# EAGLE board HEX3_leg_board_v2.0 (EAGLE 9.7.0)
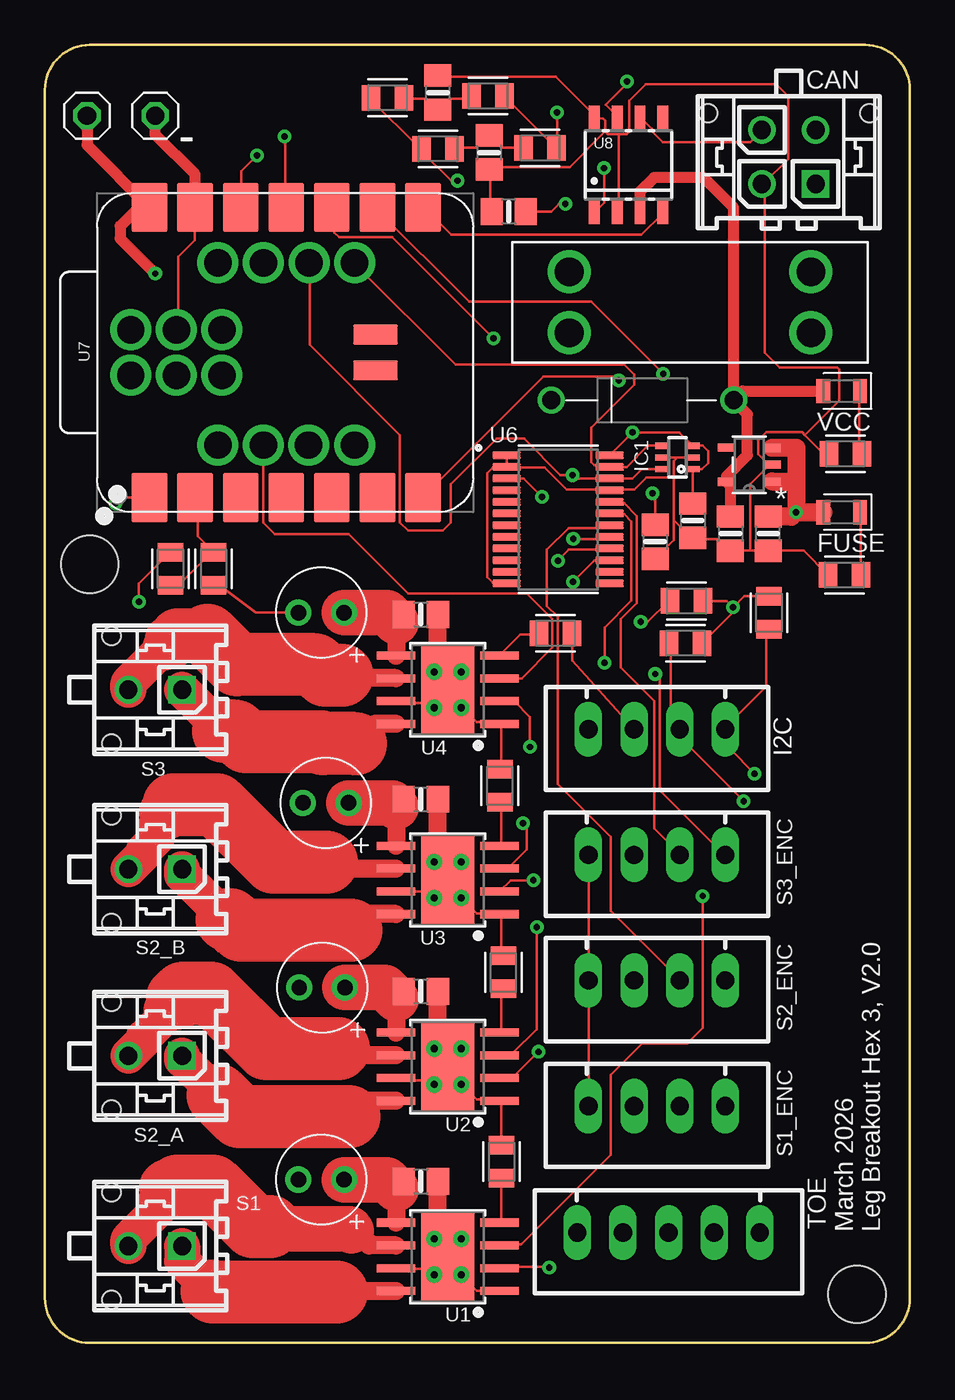
[diagram p0: board, top side]
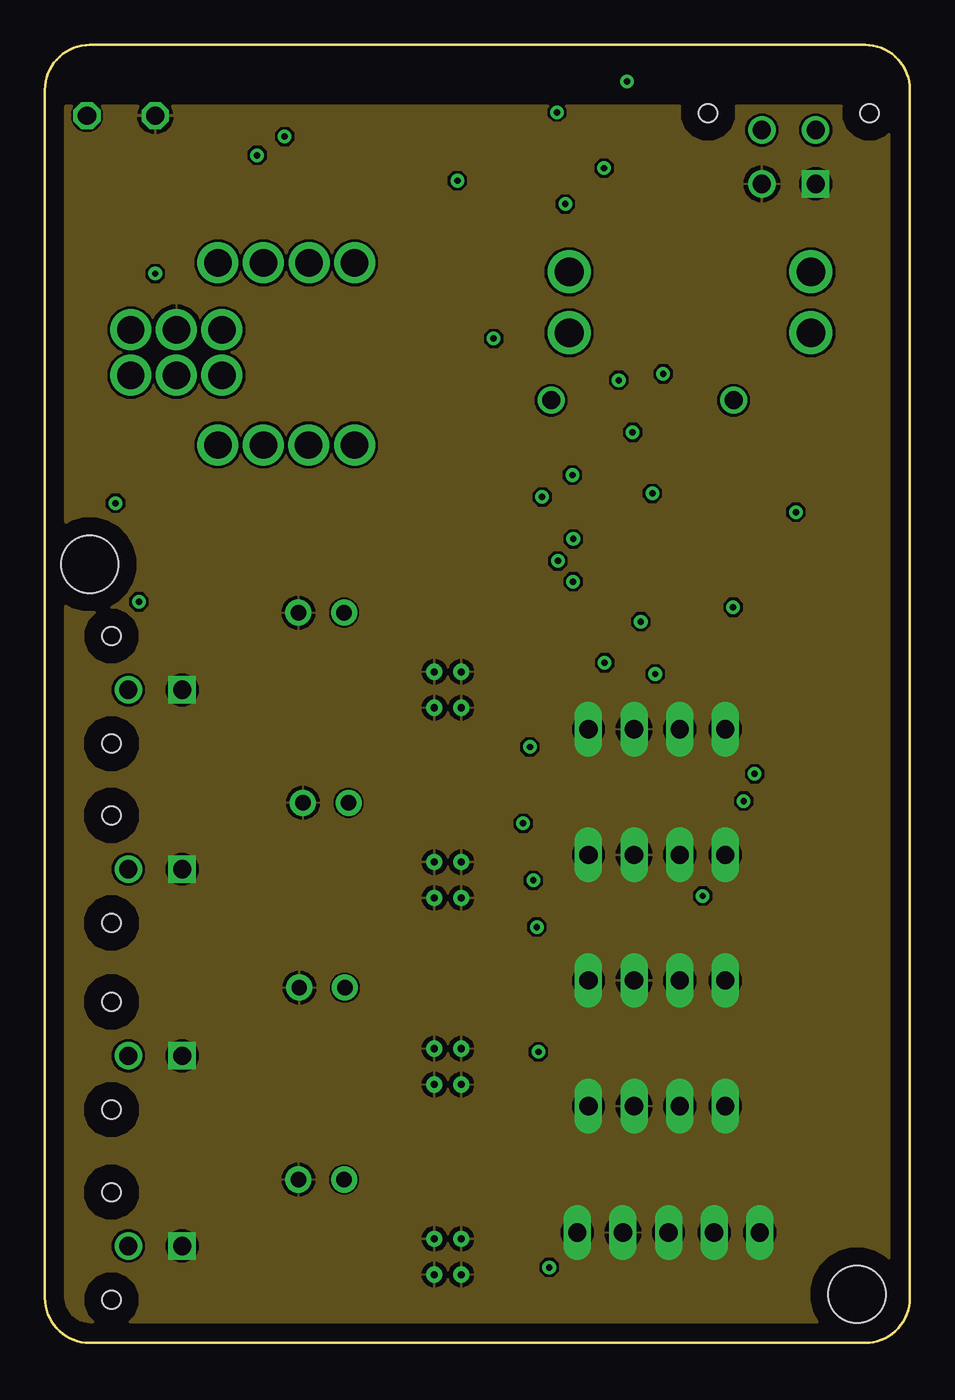
[diagram p1: board, inner layer Route2]
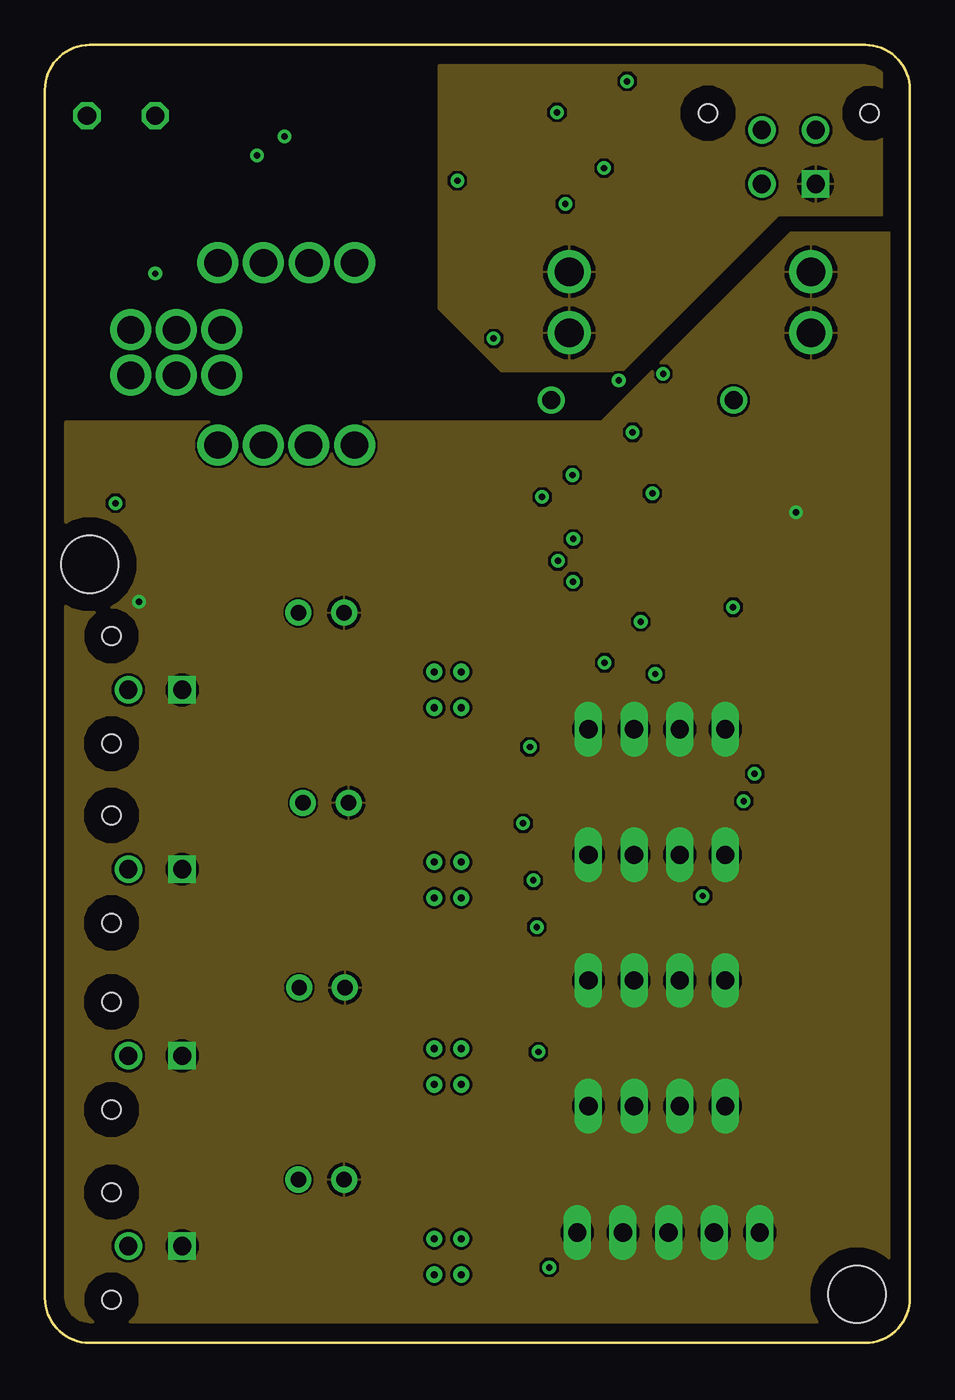
[diagram p2: board, inner layer Route15]
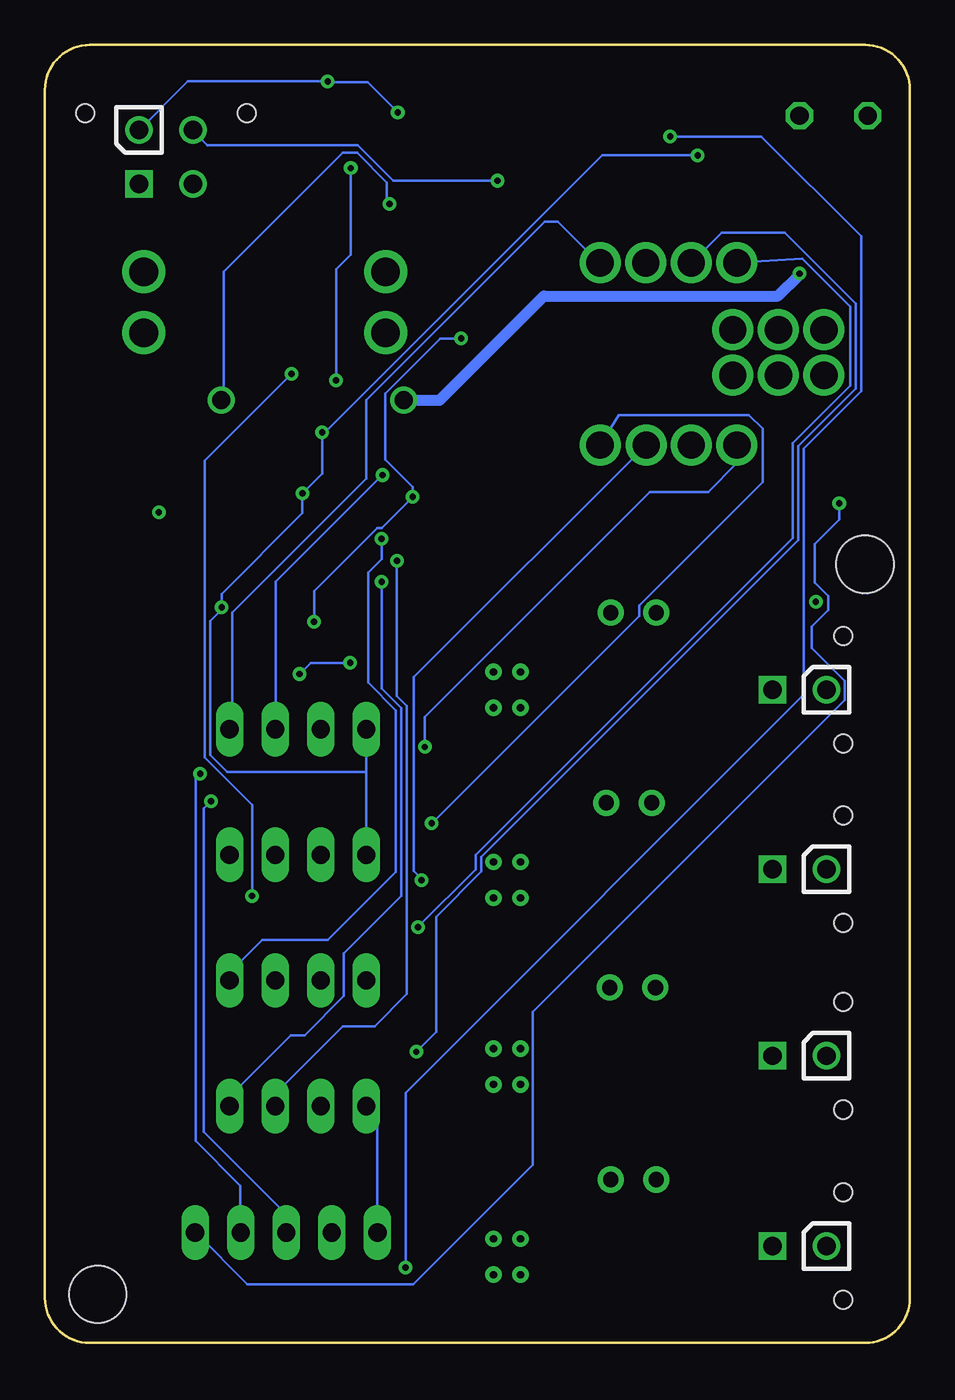
[diagram p3: board, bottom side, seen from below]

Size 48.2 x 72.35 mm. Coordinates in mm from the lower left corner, seen from the top.
Outline: 0,69.85 0,2.5 arc90 2.5,0 45.7,0 arc90 48.2,2.5 48.2,69.85 arc90 45.7,72.35 2.5,72.35 arc90 0,69.85
Copper layers (1+2*15+16): Top / Route2 / Route15 / Bottom
Stack-up 4 Layer Stack: Top SilkScreen Epoxy Ink / Top SolderMask SR:Green 0.0254mm Dk 4.3 / Top Surface Finish Lead-Free 0.02mm / Top CuFoil:007 0.035mm / Dielectric-1 Prepreg:001 0.064mm / Dielectric-2 Prepreg:001 0.064mm / Route2 CuFoil:007 0.035mm / Dielectric-3 Core:066 0.711mm / Route15 CuFoil:007 0.035mm / Dielectric-4 Prepreg:001 0.064mm / Dielectric-5 Prepreg:001 0.064mm / Bottom CuFoil:007 0.035mm / Bottom Surface Finish Lead-Free 0.02mm / Bottom SolderMask SR:Green 0.0254mm Dk 4.3 / Bottom SilkScreen Epoxy Ink
Design rules: minimum copper width 6mil, minimum drill size 0.35mm, copper clearance wire_polygon to wire_polygon 6mil, copper clearance wire_polygon to pad_smd 6mil, copper clearance wire_polygon to via 6mil, copper clearance pad_smd to pad_smd 6mil, copper clearance pad_smd to via 0.5mm, copper clearance via to via 6mil, copper clearance smd to pad (same net) 6mil, copper clearance smd to via (same net) 6mil, copper clearance smd to smd (same net) 6mil, dimension clearance 40mil, via restrict clearance 0mil, restrict clearance 0mil, drill distance 6mil, keepout clearance 0mil
Holes 3.2 mm at 45.25,2.7 2.5,43.4

## Footprints (pad centres in the part's own frame; a part is rotated, then mirrored left to right if it is on the bottom)
0805-NO = smd 1.24 x 1.5: 1 -0.95,0; 2 0.95,0
CAPPRD254W65D500H1150B = drill 0.85 pad 1.45: 1 -1.27,0; 2 1.27,0
1X01 = drill 1.016 octagon: 1 0,0
DIODE-AXIAL = drill 1: 1 -5.08,0; 2 5.08,0
JST-XH-04-PACKAGE-LONG-PAD = drill 1.016 long: 1 -3.81,0; 2 -1.27,0; 3 1.27,0; 4 3.81,0
FUSE_3557-2 = drill 1.6: 1_1 -6.735,1.7; 1_2 -6.735,-1.7; 2_1 6.735,1.7; 2_2 6.735,-1.7
LEDC2012X110N_FLAT-R = smd 0.762 x 1.362: A 1.025,0; C -1.025,0
SC70-6L = smd 0.35 x 0.8: 1 -0.65,-0.85; 2 0,-0.85; 3 0.65,-0.85; 4 0.65,0.85; 5 0,0.85; 6 -0.65,0.85
43045-0412 = drill 1.02 square: P$1 1.5,0 | drill 1.02: P$2 -1.5,0; P$3 1.5,3; P$4 -1.5,3 | hole 1.02: 4.5,3.94; -4.5,3.94
RESC2012X65 = smd 1.031 x 1.42: 1 -0.919,0; 2 0.919,0
43045-0212 = drill 1.02 square: P$1 0,0 | drill 1.02: P$2 0,3 | hole 1.02: 3,3.94; -3,3.94
JST-XH-05-PACKAGE-LONG-PAD = drill 1.016 long: 1 -5.08,0; 2 -2.54,0; 3 0,0; 4 2.54,0; 5 5.08,0
HSOP8 = smd 0.45 x 2.15: 1 -1.905,-2.875; 2 -0.635,-2.875; 3 0.635,-2.875; 4 1.905,-2.875; 5 1.905,2.875; 6 0.635,2.875; 7 -0.635,2.875; 8 -1.905,2.875 | smd 4.9 x 2.95: GND 0,0 | drill 0.4: P$1 -1,0.75; P$2 -1,-0.75; P$3 1,-0.75; P$4 1,0.75
TSOT23-5_ONS = smd 0.953 x 0.457: 1 -1.276,0.94; 2 -1.276,0; 3 -1.276,-0.94; 4 1.276,-0.953; 5 1.276,0.953
SOP65P640X120-24N = smd 1.57 x 0.41: 1 -2.87,3.575; 2 -2.87,2.925; 3 -2.87,2.275; 4 -2.87,1.625; 5 -2.87,0.975; 6 -2.87,0.325; 7 -2.87,-0.325; 8 -2.87,-0.975; 9 -2.87,-1.625; 10 -2.87,-2.275; 11 -2.87,-2.925; 12 -2.87,-3.575; 13 2.87,-3.575; 14 2.87,-2.925; 15 2.87,-2.275; 16 2.87,-1.625; 17 2.87,-0.975; 18 2.87,-0.325; 19 2.87,0.325; 20 2.87,0.975; 21 2.87,1.625; 22 2.87,2.275; 23 2.87,2.925; 24 2.87,3.575
XIAO-RP2350-SMD = smd 2 x 2.75: 1 7.62,8.082; 2 5.08,8.082; 3 2.54,8.082; 4 0,8.082; 5 -2.54,8.082; 6 -5.08,8.082; 7 -7.62,8.082; 8 -7.62,-8.082; 9 -5.08,-8.082; 10 -2.54,-8.082; 11 0,-8.082; 12 2.54,-8.082; 13 5.08,-8.082; 14 7.62,-8.082 | smd 2.5 x 1.1: 29 -4.975,1; 30 -4.975,-1 | drill 1.524: P$1 3.581,1.27; P$2 6.121,1.27; P$3 8.661,1.27; P$4 8.661,-1.27; P$5 6.121,-1.27; P$6 3.581,-1.27; P$7 3.81,-5.004; P$8 1.27,-5.004; P$9 -1.27,-5.004; P$10 -3.81,-5.004; P$11 -3.81,5.156; P$12 -1.245,5.156; P$13 1.27,5.156; P$14 3.81,5.156
SOT96-1 = smd 0.6 x 1.3: 1 -1.905,-2.65; 2 -0.635,-2.65; 3 0.635,-2.65; 4 1.905,-2.65; 5 1.905,2.65; 6 0.635,2.65; 7 -0.635,2.65; 8 -1.905,2.65
LEDC2012X110N_FLAT-B = smd 0.762 x 1.362: A 1.025,0; C -1.025,0

## Placement (x,y rotation side)
C1  0.1uF/50V  [0805-NO]  20.95,19.6 0 top
C2  22uF/50V  [CAPPRD254W65D500H1150B]  15.45,19.8 180 top
C3  0.1uF/50V  [0805-NO]  20.95,30.3 0 top
C4  22uF/50V  [CAPPRD254W65D500H1150B]  15.65,30.1 180 top
C5  0.1uF/50V  [0805-NO]  20.95,40.6 0 top
C6  22uF/50V  [CAPPRD254W65D500H1150B]  15.4,40.7 180 top
C7  0.1uF/50V  [0805-NO]  20.95,9 0 top
C8  47nF  [0805-NO]  24.75,66.35 270 top
C9  1uF  [0805-NO]  38.2,45.1 270 top
C10  1uF  [0805-NO]  40.3,45.1 90 top
C11  47nF  [0805-NO]  21.9,69.69 90 top
C12  10uF  [0805-NO]  34,44.65 270 top
C13  0.1uF  [0805-NO]  25.85,63.05 180 top
C14  0.01uF  [0805-NO]  36.1,45.83 270 top
C15  22uF/50V  [CAPPRD254W65D500H1150B]  15.4,9.1 180 top
CAP_5V_DIODE  PINHD-1X1  [1X01]  2.35,68.4 0 top
CAP_GND  PINHD-1X1  [1X01]  6.15,68.4 0 top
D1  DIODEDIODE-AXIAL  [DIODE-AXIAL]  33.29,52.54 180 top
EXTRA  JST-XH-04-PIN-LONG-PAD  [JST-XH-04-PACKAGE-LONG-PAD]  34.1,34.2 180 top
F1  3557-2  [FUSE_3557-2]  35.95,58 0 top
FUSE  LED_RED  [LEDC2012X110N_FLAT-R]  44.4,46.3 180 top
IC1  LTC4311_SC70  [SC70-6L]  35.25,49.35 90 top
IN  [43045-0412]  41.45,64.6 0 top
R1  1.5K  [RESC2012X65]  44.55,42.8 180 top
R2  470  [RESC2012X65]  44.6,49.55 180 top
R3  62K  [RESC2012X65]  7,43.15 90 top
R4  10K  [RESC2012X65]  9.4,43.15 90 top
R5  10K  [RESC2012X65]  35.75,41.35 180 top
R6  10K  [RESC2012X65]  40.35,40.7 270 top
R7  22K  [RESC2012X65]  25.45,10.1 270 top
R8  22K  [RESC2012X65]  25.35,31.05 270 top
R9  22K  [RESC2012X65]  28.45,39.55 180 top
R10  22K  [RESC2012X65]  25.55,20.65 270 top
R11  10K  [RESC2012X65]  35.7,39 180 top
R12  60  [RESC2012X65]  21.9,66.55 180 top
R14  60  [RESC2012X65]  24.69,69.5 180 top
R15  60  [RESC2012X65]  19.1,69.4 180 top
R16  60  [RESC2012X65]  27.6,66.6 180 top
S1  [43045-0212]  7.65,5.4 90 top
S1_ENC  JST-XH-04-PIN-LONG-PAD  [JST-XH-04-PACKAGE-LONG-PAD]  34.1,13.2 180 top
S2_A  [43045-0212]  7.65,16 90 top
S2_B  [43045-0212]  7.65,26.4 90 top
S2_ENC  JST-XH-04-PIN-LONG-PAD  [JST-XH-04-PACKAGE-LONG-PAD]  34.1,20.2 180 top
S3  [43045-0212]  7.65,36.4 90 top
S3_ENC  JST-XH-04-PIN-LONG-PAD  [JST-XH-04-PACKAGE-LONG-PAD]  34.1,27.2 180 top
TOE  JST-XH-05-PIN-LONG-PAD  [JST-XH-05-PACKAGE-LONG-PAD]  34.75,6.15 180 top
U1  DRV8871  [HSOP8]  22.45,4.8 90 top
U2  DRV8871  [HSOP8]  22.45,15.4 90 top
U3  DRV8871  [HSOP8]  22.45,25.8 90 top
U4  DRV8871  [HSOP8]  22.45,36.4 90 top
U5  NCP718ASN500T1GTSOT23-5_ONS  [TSOT23-5_ONS]  39.25,48.95 180 top
U6  TCA9548APWR  [SOP65P640X120-24N]  28.6,45.9 0 top
U7  XIAO-RP2350-SMD  [XIAO-RP2350-SMD]  13.45,55.2 180 top
U8  TJA1050  [SOT96-1]  32.52,65.66 0 top
VCC  LED_BLUE  [LEDC2012X110N_FLAT-B]  44.39,53.05 180 top

## Library data of the parts
C1 C3 C5 C7-C14 IC1 U1-U4 = microbuilder
C2 C4 C6 C15 D1 = Tinkercad
CAP_5V_DIODE CAP_GND = Connector; CATEGORY: Headers; DESCRIPTION: Header-Straight-1 Position; PACKAGE_TYPE: THT; PITCH: 0.100" (2.54mm); SUBCATEGORY: Headers-Male Pins; TYPE: Board to Board or Cable-Unshrouded-Through Hole-Straight
EXTRA S1_ENC S2_ENC S3_ENC TOE = Rembrandt Electronics - JST XH Connectors v1-0
F1 = Mini Blade Fuse 3557-2; AVAILABILITY: In Stock; CHECK_PRICES: https://www.snapeda.com/parts/3557-2/Keystone/view-part/?ref=eda; DESCRIPTION: THM 2 in 1 Auto Blade Holder; MF: Keystone Electronics; MP: 3557-2; PACKAGE: Nonstandard Keystone; PRICE: None; SNAPEDA_LINK: https://www.snapeda.com/parts/3557-2/Keystone/view-part/?ref=snap
FUSE = LED; CATEGORY: LED; COLOR: RED; DESCRIPTION: CHIP LED FLAT; SUB-CATEGORY: CHIP; TYPE: FLAT_TOP
IN S1 S2_A S2_B S3 = Molex Connectors
R1-R12 R14-R16 = Resistor; CATEGORY: Resistors; DESCRIPTION: Chip Resistor 2.00 X 1.25 X 0.65 mm body 0805(2012-METRIC) Package; PACKAGE_SIZE: 0805; PACKAGE_TYPE: SMD
U5 = NCP718ASN500T1G Voltage Regulator; COPYRIGHT: Copyright (C) 2025 Ultra Librarian. All rights reserved.; MANUFACTURER_NAME: onsemi; MANUFACTURER_PART_NUMBER: NCP718ASN500T1G
U6 = TCA9548APWR I2C MUX; AVAILABILITY: In Stock; CHECK_PRICES: https://www.snapeda.com/parts/TCA9548APWR/Texas+Instruments/view-part/?ref=eda; DESCRIPTION: 8-channel 1.65- to 5.5-V I2C/SMBus switch with reset & voltage translation; MF: Texas Instruments; MP: TCA9548APWR; PACKAGE: TSSOP-24 Texas Instruments; PRICE: None; SNAPEDA_LINK: https://www.snapeda.com/parts/TCA9548APWR/Texas+Instruments/view-part/?ref=snap
U7 = XIAO-RP2350-SMD
U8 = TJA1050; AVAILABILITY: In Stock; CHECK_PRICES: https://www.snapeda.com/parts/TJA1050/NXP+Semiconductors/view-part/?ref=eda; DESCRIPTION: CAN 1MBd Silent 5V Automotive 8-Pin SO T/R; MF: NXP Semiconductors; MP: TJA1050; PACKAGE: None; PRICE: None; SNAPEDA_LINK: https://www.snapeda.com/parts/TJA1050/NXP+Semiconductors/view-part/?ref=snap
VCC = LED; CATEGORY: LED; COLOR: BLUE; DESCRIPTION: CHIP LED FLAT; SUB-CATEGORY: CHIP; TYPE: FLAT_TOP

## Nets
3.3V: C12.1 C14.1 EXTRA.4 IC1.1 IC1.3 R5.1 R6.1 R11.1 S1_ENC.4 S2_ENC.4 S3_ENC.4 TOE.5 U6.24 U7.12
5V: C9.1 C13.1 D1.1 U5.5 U8.3 VCC.A
5V_DIODE: CAP_5V_DIODE.1 D1.2 U7.14
24V: F1.1_1 F1.1_2 IN.P$1
24V_FUSE: C1.1 C2.1 C3.1 C4.1 C5.1 C6.1 C7.1 C10.2 C15.1 F1.2_1 F1.2_2 FUSE.A R3.2 U1.5 U2.5 U3.5 U4.5 U5.1 U5.3
CAN_RX: U7.8 U8.4
CAN_TX: U7.7 U8.1
CANH: IN.P$3 R14.1 R16.1 U8.7
CANL: IN.P$4 R12.2 R15.2 U8.6
GND: C1.2 C2.2 C3.2 C4.2 C5.2 C6.2 C7.2 C8.2 C9.2 C10.1 C11.2 C12.2 C13.2 C14.2 C15.2 CAP_GND.1 EXTRA.3 IC1.2 IC1.5 IN.P$2 R1.2 R2.2 R4.1 R7.1 R8.1 R9.1 R10.1 S1_ENC.3 S2_ENC.3 S3_ENC.3 TOE.4 U1.1 U1.7 U1.GND U1.P$1 U1.P$2 U1.P$3 U1.P$4 U2.1 U2.7 U2.GND U2.P$1 U2.P$2 U2.P$3 U2.P$4 U3.1 U3.7 U3.GND U3.P$1 U3.P$2 U3.P$3 U3.P$4 U4.1 U4.7 U4.GND U4.P$1 U4.P$2 U4.P$3 U4.P$4 U5.2 U6.1 U6.2 U6.12 U6.21 U7.13 U7.P$5 U8.2 U8.8
MUX_RESET: R5.2 U6.3 U7.10
MUX_SCL: EXTRA.2 IC1.6 R11.2 TOE.3 U6.22 U7.P$9
MUX_SDA: EXTRA.1 IC1.4 R6.2 TOE.2 U6.23 U7.P$10
N$1: R7.2 U1.4
N$2: R10.2 U2.4
N$3: R8.2 U3.4
N$4: R9.2 U4.4
N$6: FUSE.C R1.1
N$8: R2.1 VCC.C
N$9: R3.1 R4.2 U7.2
N$10: C11.1 R14.2 R15.1
N$11: C8.1 R12.1 R16.2
OUT1: S1.P$2 U1.6
OUT2: S1.P$1 U1.8
OUT3: S2_A.P$1 U2.8
OUT4: S2_A.P$2 U2.6
OUT5: S2_B.P$1 U3.8
OUT6: S2_B.P$2 U3.6
OUT7: S3.P$1 U4.8
OUT8: S3.P$2 U4.6
S1_A: U1.3 U7.9
S1_B: U1.2 U7.11
S1_SCL: S1_ENC.2 U6.16
S1_SDA: S1_ENC.1 U6.15
S2_SCL: S2_ENC.2 U6.18
S2_SDA: S2_ENC.1 U6.17
S2A_A: U2.3 U7.P$7
S2A_B: U2.2 U7.P$8
S2B_A: U3.3 U7.P$11
S2B_B: U3.2 U7.P$12
S3_A: U4.3 U7.P$13
S3_B: U4.2 U7.P$14
S3_SCL: S3_ENC.2 U6.20
S3_SDA: S3_ENC.1 U6.19
TOE_GPIO: TOE.1 U7.1

## Tracks (layer width: path | path; a pad name or v marks a point on that pad's centre or on a via)
3.3V  (via drill 0.35)
  Top 0.152: C14.1 IC1.1 36.6,48.7 36.95,49.05 36.95,49.7 36.65,50 IC1.3 35.35,50.75 v32.75,50.75 32.55,50.55 U6.24 | v33.85,47.35 34,47.2 C12.1 | v38.35,41 38,41.35 R5.1 | v38.35,41 38.97,41.62 R6.1 | v38.35,41 38.35,40.73 R11.1 | S1_ENC.4 30.3,13.27 30.3,20.13 S2_ENC.4 30.3,20.28 30.3,27.14 S3_ENC.4 | v11.83,66.19 10.95,65.31 10.95,63.41 U7.12
  Bottom 0.152: 30.3,31.82 30.3,34.15 EXTRA.4 | 30.3,31.82 30.3,27.29 S3_ENC.4 | 30.3,31.82 38.03,31.82 38.99,32.78 38.99,40.24 38.38,40.85 v38.35,41 38.35,41.75 33.85,46.25 v33.85,47.35 32.75,48.45 v32.75,50.75 32.74,50.61 17.15,66.19 v11.83,66.19 | TOE.5 29.69,6.26 29.69,12.66 30.15,13.12 S1_ENC.4
5V  (via drill 0.35)
  Top 0.152: C13.1 28.21,63.05 28.64,63.48 v29,63.48
  Top 0.61: D1.1 38.88,53.05 VCC.A | D1.1 39.15,51.76 39.15,49.47 37.97,48.3 U5.5 38.2,47.77 C9.1 | D1.1 38.37,63.28 36.7,64.95 33.95,64.95 33.16,64.16 U8.3
  Bottom 0.152: D1.1 38.23,52.59 38.23,59.72 31.61,66.33 30.8,66.33 29.15,64.68 29.15,63.63 v29,63.48
5V_DIODE  (via drill 0.35)
  Top 0.61: v6.15,59.6 4.2,61.55 4.2,62.25 5.23,63.28 U7.14 2.35,66.76 CAP_5V_DIODE.1
  Bottom 0.61: D1.2 26.21,52.54 20.4,58.35 7.35,58.35 6.15,59.55 v6.15,59.6
24V
  pour Route15: 21.9,72 21.9,57.6 25.4,54.1 32.2,54.1 40.9,62.8 46.7,62.8 46.7,72
24V_FUSE  (via drill 0.35)
  Top 0.152: R3.2 5.24,42.31 v5.24,41.31
  Top 1.016: v41.85,46.3 41.88,46.33 41.88,47.83 | v41.85,46.3 41.6,46.05 C10.2 | U4.5 19.57,40.18 C5.1 | U3.5 19.57,29.87 C3.1 | U2.5 19.57,19.18 C1.1 | U1.5 19.57,8.57 C7.1 | U5.1 41.69,48.01 41.88,47.83 | U5.3 41.88,49.89 41.88,47.83 | v41.85,46.3 FUSE.A
  Top 2.54: C6.1 19.05,40.7 19.57,40.18 | C15.1 19.05,9.1 19.57,8.57 | C2.1 18.95,19.8 19.57,19.18 | C4.1 19.35,30.1 19.57,29.87
  pour Route15: -3.65,-2.85 51.3,-2.85 51.75,-2.4 51.75,58.95 48.75,61.95 41.55,61.95 31,51.4 -3.3,51.4 -3.9,50.8 -3.9,-2.6
CAN_RX
  Top 0.152: U8.4 34.42,62.95 33.24,61.77 22.64,61.77 21.16,63.26 U7.8
CAN_TX  (via drill 0.35)
  Top 0.152: v31.16,65.48 31.16,63.55 U8.1 | v31.98,53.66 31.78,53.86 27.76,53.86 21.16,47.25 U7.7
  Bottom 0.152: v31.16,65.48 31.16,60.66 31.98,59.84 v31.98,53.66
CANH  (via drill 0.35)
  Top 0.152: v32.44,70.32 32.44,70.22 31.24,69.02 31.83,68.44 U8.7 | v28.54,68.58 28.54,66.6 R16.1 28.47,66.61 25.73,69.35 R14.1
  Bottom 0.152: IN.P$3 40.24,70.32 v32.44,70.32 32.44,70.27 30.22,70.27 v28.54,68.58
CANL  (via drill 0.35)
  Top 0.152: R15.2 18.11,69.35 20.85,66.61 R12.2 20.98,66.44 22.64,64.78 v22.99,64.78 | U8.6 33.2,68.28 33.81,67.68 33.81,67.52 34.42,66.91 39.29,66.91 39.9,67.52 IN.P$4
  Bottom 0.152: v22.99,64.78 28.78,64.78 30.76,66.76 39.14,66.76 39.9,67.52 IN.P$4
GND
  Top 0.152: 21.61,3.82 21.31,4.12 19.63,4.12 U1.7 | 23.29,3.67 U1.GND 21.61,3.82 | 21.61,24.85 21.31,25.16 19.63,25.16 U3.7 | U2.7 19.63,14.64 21.46,14.64 21.61,14.49 U2.GND | U2.GND 23.29,14.34 24.05,13.57 25.27,13.57 U2.1 25.43,13.42 25.43,11.14 R7.1 | 21.61,35.52 21.46,35.67 19.63,35.67 U4.7 | R4.1 9.75,42.22 11.74,40.7 C6.2 | U7.13 8.36,63.26 8.36,61.47 7.44,60.56 7.44,56.55 U7.P$5 | 21.61,35.52 U4.GND 23.29,35.37 24.05,34.61 25.27,34.61 U4.1 25.43,34.45 25.43,32.01 R8.1 | 21.61,35.52 U4.P$1 | U2.GND 23.29,16.47 U2.P$3 | 21.61,24.85 U3.GND 23.29,24.7 24.05,23.94 25.27,23.94 U3.1 25.43,23.78 25.43,21.65 R10.1 | 21.61,24.85 U3.P$1 | 21.61,3.82 U1.P$1 | 31.22,67.52 31.37,67.37 31.98,67.37 | 31.22,67.52 31.22,67.53 31.22,68.13 31.12,68.23 U8.8 30.61,68.44 28.47,70.57 21.92,70.57 C11.2 | 39.29,44.15 C9.2 38.07,44.21 37.46,44.82 36.25,44.82 C14.2 36.02,44.88 35.05,45.85 | 39.29,44.15 C10.1 42.28,44.15 R1.2 | IC1.5 35.25,49.35 | 35.25,49.35 IC1.2 | 35.25,49.35 35.05,49.15 35.05,48.22 | 35.05,48.22 35.05,45.85 | 35.05,45.85 35.05,44.75 C12.2 | U6.12 25.73,42.38 24.97,42.38 24.66,42.68 24.66,48.47 24.97,48.78 25.73,48.78 U6.2 | U6.1 25.73,49.39 25.73,48.93 U6.2 | 35.05,48.22 33.5,48.22 32.85,47.56 31.52,47.56 U6.21 31.37,47.56 29.08,47.56 27.86,48.78 25.88,48.78 U6.2 | 40.36,48.93 40.51,48.93 U5.2 40.36,48.93 | 40.36,48.93 39.29,47.86 39.29,44.15 | 42.34,50.61 42.19,50.76 40.21,50.76 39.75,50.3 39.75,49.54 40.36,48.93 | 42.34,50.61 43.26,49.69 43.56,49.69 R2.2 | 29.39,38.03 29.39,39.48 R9.1 | 29.39,38.03 | EXTRA.3 29.39,38.03 | 23.29,3.67 24.05,2.91 25.27,2.91 U1.1 | 23.29,3.67 U1.P$2 | 31.98,67.37 32.42,67.37 32.57,67.51 32.57,69.24 33.47,70.14 40.76,70.14 41.42,69.48 41.42,65.99 40.05,64.63 IN.P$2 40.1,64.45 40.1,55.2 40.95,54.35 44.15,54.35 44.25,54.25 44.25,52.52 42.34,50.61
  Top 0.152: C13.2 24.81,63.1 24.81,65.39 C8.2 24.81,65.54 29.23,65.54 31.22,67.52 | 31.98,67.37 31.98,63.1 U8.2
  Top 0.61: CAP_GND.1 6.15,67.35 8.37,65.13 U7.13
  Top 1.016: C7.2 21.9,6 U1.P$4 | C1.2 21.9,16.6 U2.P$4 | C3.2 21.9,27 U3.P$4 | C5.2 21.9,37.6 U4.P$4
  pour Route2: -14.95,69 63.05,69 63.05,6.6 49.25,-7.2 -10.95,-7.2 -16.55,-1.6 -14.95,0
MUX_RESET  (via drill 0.35)
  Top 0.152: v33.2,40.19 33.6,40.19 34.72,41.31 R5.2 | v27.71,47.15 26.69,48.17 25.88,48.17 U6.3 | U7.10 16.13,63.26 16.13,61.89 16.4,61.62 19.36,61.62 v25,55.98
  Bottom 0.152: v33.2,40.19 33.2,41.91 29.69,45.42 29.44,45.42 v27.71,47.15 27.71,47.7 29.23,49.23 29.23,52.91 26.16,55.98 v25,55.98
MUX_SCL  (via drill 0.35)
  Top 0.152: IC1.6 33.25,48.7 32.73,48.18 U6.22 29.59,48.17 v29.39,48.37 28.73,48.37 26.7,50.4 25.17,50.4 22.63,47.86 22.63,45.73 22.17,45.28 20.24,45.28 19.79,45.73 19.79,50.61 14.76,55.64 14.76,60.06 U7.P$9 | R11.2 34.87,38.87 34.87,34.76 35.33,34.3 EXTRA.2 35.37,33.76 v38.94,30.19
  Bottom 0.152: v29.39,48.37 35.33,42.43 35.33,34.3 EXTRA.2 | v38.94,30.19 39.34,29.79 39.34,11.75 34.87,7.29 34.87,6.26 TOE.3
MUX_SDA  (via drill 0.35)
  Top 0.152: IC1.4 33.6,50 32.43,48.83 U6.23 31.37,48.93 30.61,48.93 30.45,49.08 30.45,51.02 32.84,53.4 32.84,53.96 32.28,54.52 22.88,54.52 17.35,60.06 U7.P$10 | R6.2 40.21,39.63 40.21,36.59 37.92,34.3 EXTRA.1 38.15,33.12 v39.55,31.72
  Bottom 0.152: U7.P$10 17.35,60.21 19.63,62.49 20.35,62.49 30.3,52.54 30.3,48.17 37.77,40.7 37.77,34.3 EXTRA.1 | v39.55,31.72 39.8,31.47 39.8,11.25 37.31,8.77 37.31,6.26 TOE.2
N$1
  Top 0.152: R7.2 25.43,9.15 25.43,6.72 U1.4
N$2
  Top 0.152: R10.2 25.43,19.67 25.43,17.38 U2.4
N$3
  Top 0.152: R8.2 25.43,30.03 25.43,27.75 U3.4
N$4
  Top 0.152: R9.2 27.41,39.48 26.49,39.48 25.43,38.42 U4.4
N$6
  Top 0.152: FUSE.C 45.47,46.25 R1.1
N$8
  Top 0.152: VCC.C 45.39,53.05 45.39,49.69 R2.1
N$9
  Top 0.152: R3.1 7.14,42.38 7.59,42.38 9.27,44.05 R4.2 9.27,44.21 8.51,44.97 8.51,47.1 U7.2
N$10
  Top 0.152: R15.1 20.09,69.35 21.16,69.35 21.77,68.74 C11.1 21.92,68.74 22.53,69.35 23.75,69.35 R14.2
N$11
  Top 0.152: R12.1 22.83,66.61 24.05,66.61 24.66,67.22 C8.1 24.81,67.22 25.43,66.61 26.64,66.61 R16.2
OUT1
  Top 1.016: U1.6 18.06,5.43 18.05,5.45 18.05,5.6 17.4,6.25 17.08,6.25
  Top 2: 6.74,8.65 6.24,8.15 6.24,7.35 4.65,5.77 S1.P$2
  Top 2.54: 17.08,6.25 16.98,6.34 12.7,6.34
  Top 3: 6.74,8.65 6.84,8.75 7.4,8.75 | 12.55,6.5 12.7,6.34
  Top 3.5: 7.4,8.75 9.35,8.75 11.6,6.5 12.55,6.5
OUT2
  Top 1.016: U1.8 16.3,2.9 16.25,2.84
  Top 2: 9.3,2.9 7.65,4.55 S1.P$1
  Top 3.5: 9.3,2.9 9.36,2.84 16.25,2.84
OUT3
  Top 1.016: U2.8 17.89,13.5 17,12.6 16.95,12.6
  Top 2: 9.65,13.8 7.65,15.8 S2_A.P$1
  Top 3.5: 16.95,12.6 10.85,12.6 9.65,13.8
OUT4
  Top 1.016: 16.35,16.4 17.25,16.4 17.6,16.05 U2.6
  Top 2: S2_A.P$2 5.5,16.85 5.5,17.01 6.75,18.26 6.75,18.55
  Top 2.54: 6.75,18.55 7.4,19.2
  Top 3.5: 16.35,16.4 12.35,16.4 9.25,19.5 7.7,19.5 7.4,19.2
OUT5
  Top 1.016: U3.8 17.95,23.89 17.95,23.9 17.05,23
  Top 2: 10.15,23.6 7.65,26.1 S2_B.P$1
  Top 3.5: 17.05,23 10.91,23 10.31,23.6 10.15,23.6
OUT6
  Top 1.016: U3.6 16.06,26.43 15.7,26.8
  Top 2: S2_B.P$2 5.5,27.25 5.5,27.41 6.25,28.16 6.25,29.05 6.75,29.55
  Top 3: 6.75,29.55 7.2,30
  Top 3.5: 15.7,26.8 12.75,26.8 9.55,30 7.2,30
OUT7
  Top 1.016: U4.8 18.39,34.5 17.3,33.4
  Top 2: 9.95,34.1 S3.P$1
  Top 3.5: 17.3,33.4 15.5,33.4 15.4,33.5 11.21,33.5 10.61,34.1 9.95,34.1
OUT8
  Top 1.016: U4.6 16.7,37.05 16.55,37.2
  Top 2: S3.P$2 4.65,36.77 6.63,38.75 6.7,38.75
  Top 2.54: 6.7,38.75 7.05,39.1
  Top 3: 7.05,39.1 7.4,39.45 9.05,39.45
  Top 3.5: 9.05,39.45 10.7,37.8 15.05,37.8 15.65,37.2 16.55,37.2
S1_A  (via drill 0.35)
  Top 0.152: v34.45,54.01 30.44,58.03 23.64,58.03 18.41,63.26 U7.9 | U1.3 25.43,5.5 26.53,5.5 31.53,10.49 31.53,14.93 33.3,16.7 35.8,16.7 36.65,17.55 v36.65,24.91
  Bottom 0.152: v36.65,24.91 36.65,29.98 39.29,32.62 39.29,49.17 v34.45,54.01
S1_B  (via drill 0.35)
  Top 0.152: v28.1,4.2 28.08,4.23 25.38,4.23 U1.2 | v13.36,67.24 13.38,67.21 13.38,63.41 U7.11
  Bottom 0.152: v28.1,4.2 28.1,13.94 5.92,36.13 5.92,49.85 2.72,53.05 2.72,61.67 8.29,67.24 v13.36,67.24
S1_SCL  (via drill 0.35)
  Top 0.152: v28.59,43.59 29.2,44.21 31.37,44.21 U6.16
  Bottom 0.152: S1_ENC.2 35.32,13.25 35.32,13.93 31.6,17.65 29.83,17.65 28.04,19.44 28.04,35.51 28.59,36.05 v28.59,43.59
S1_SDA  (via drill 0.35)
  Top 0.152: v29.43,42.42 30.61,43.6 31.37,43.6 U6.15
  Bottom 0.152: S1_ENC.1 37.91,13.75 34.51,17.15 33.72,17.15 31.54,19.33 31.54,21.71 28.34,24.91 28.34,35.38 29.43,36.47 v29.43,42.42
S2_SCL
  Top 0.152: U6.18 31.37,45.43 29.19,45.43 27.98,44.21 27.98,41.08 28.58,40.48 28.58,31.14 31.53,28.2 31.53,24.08 35.33,20.28 S2_ENC.2
S2_SDA  (via drill 0.35)
  Top 0.152: U6.17 31.37,44.82 29.6,44.82 29.6,44.81 v29.44,44.81
  Bottom 0.152: S2_ENC.1 37.91,20.64 36.09,22.46 32.45,22.46 28.65,26.26 28.65,35.26 30.19,36.8 30.19,42.94 29.44,43.7 v29.44,44.81
S2A_A  (via drill 0.35)
  Top 0.152: U2.3 25.43,16.16 26.08,16.16 27.4,17.49 v27.4,23.17 v27.41,23.17
  Bottom 0.152: U7.P$7 6,60.44 3.33,57.77 3.33,53.35 6.53,50.15 6.53,44.87 24.19,27.21 24.19,26.4 v27.41,23.17
S2A_B  (via drill 0.35)
  Top 0.152: v27.5,16.22 26.08,14.79 25.43,14.79 U2.2
  Bottom 0.152: v27.5,16.22 26.4,17.32 26.4,23.75 23.88,26.27 23.88,27.08 6.22,44.74 6.22,50 3.02,53.2 3.02,57.92 6.98,61.88 10.49,61.88 12.17,60.21 U7.P$8
S2B_A  (via drill 0.35)
  Top 0.152: U3.3 25.43,26.53 25.88,26.53 26.85,27.49 26.85,28.76 v26.65,28.96
  Bottom 0.152: U7.P$11 16.23,51.72 8.97,51.72 8.2,50.96 8.2,47.98 15.08,41.1 15.08,40.52 v26.65,28.96
S2B_B  (via drill 0.35)
  Top 0.152: U3.2 25.95,25.79 v27.22,25.79
  Bottom 0.152: U7.P$12 27.63,37.1 27.63,26.3 27.22,25.88 v27.22,25.79
S3_A
  Top 0.152: U4.3 25.43,37.04 26.57,37.04 28.27,38.75 28.27,40.36 26.86,41.77 20.24,41.77 16.94,45.08 12.82,45.08 12.17,45.73 12.17,50 U7.P$13
S3_B  (via drill 0.35)
  Top 0.152: v27.03,33.22 27.03,34.88 26.15,35.77 U4.2
  Bottom 0.152: U7.P$14 9.64,49.04 11.25,47.43 14.48,47.43 27.03,34.88 v27.03,33.22
S3_SCL
  Top 0.152: U6.20 31.52,46.8 32.28,46.8 32.99,46.09 32.99,41.24 32.1,40.35 32.1,37.63 33.96,35.77 33.96,28.66 35.33,27.29 S3_ENC.2
S3_SDA  (via drill 0.35)
  Top 0.152: v34.01,37.28 v34.01,37.27 34.26,37.02 34.26,30.79 37.77,27.29 S3_ENC.1 | U6.19 31.52,46.19 32.28,46.19 32.68,45.79 32.68,41.36 31.19,39.87 v31.19,37.91
  Bottom 0.152: v34.01,37.28 33.38,37.91 v31.19,37.91
TOE_GPIO  (via drill 0.35)
  Top 0.152: v3.94,46.8 4.24,47.1 5.77,47.1 U7.1
  Bottom 0.152: v3.94,46.8 3.94,45.88 5.31,44.51 5.31,42.38 4.55,41.62 4.55,40.85 5.46,39.94 5.46,38.72 3.63,36.89 3.63,35.82 21,18.45 21,9.92 27.66,3.27 36.91,3.27 39.75,6.11 TOE.1

## Text on the board
tPlace: March 2026 / Leg Breakout Hex 3, V2.0
tNames: CAN | - | I2C | S3 | S2_B | S2_A | S1